# EAGLE board grad- (EAGLE 7.4.0)
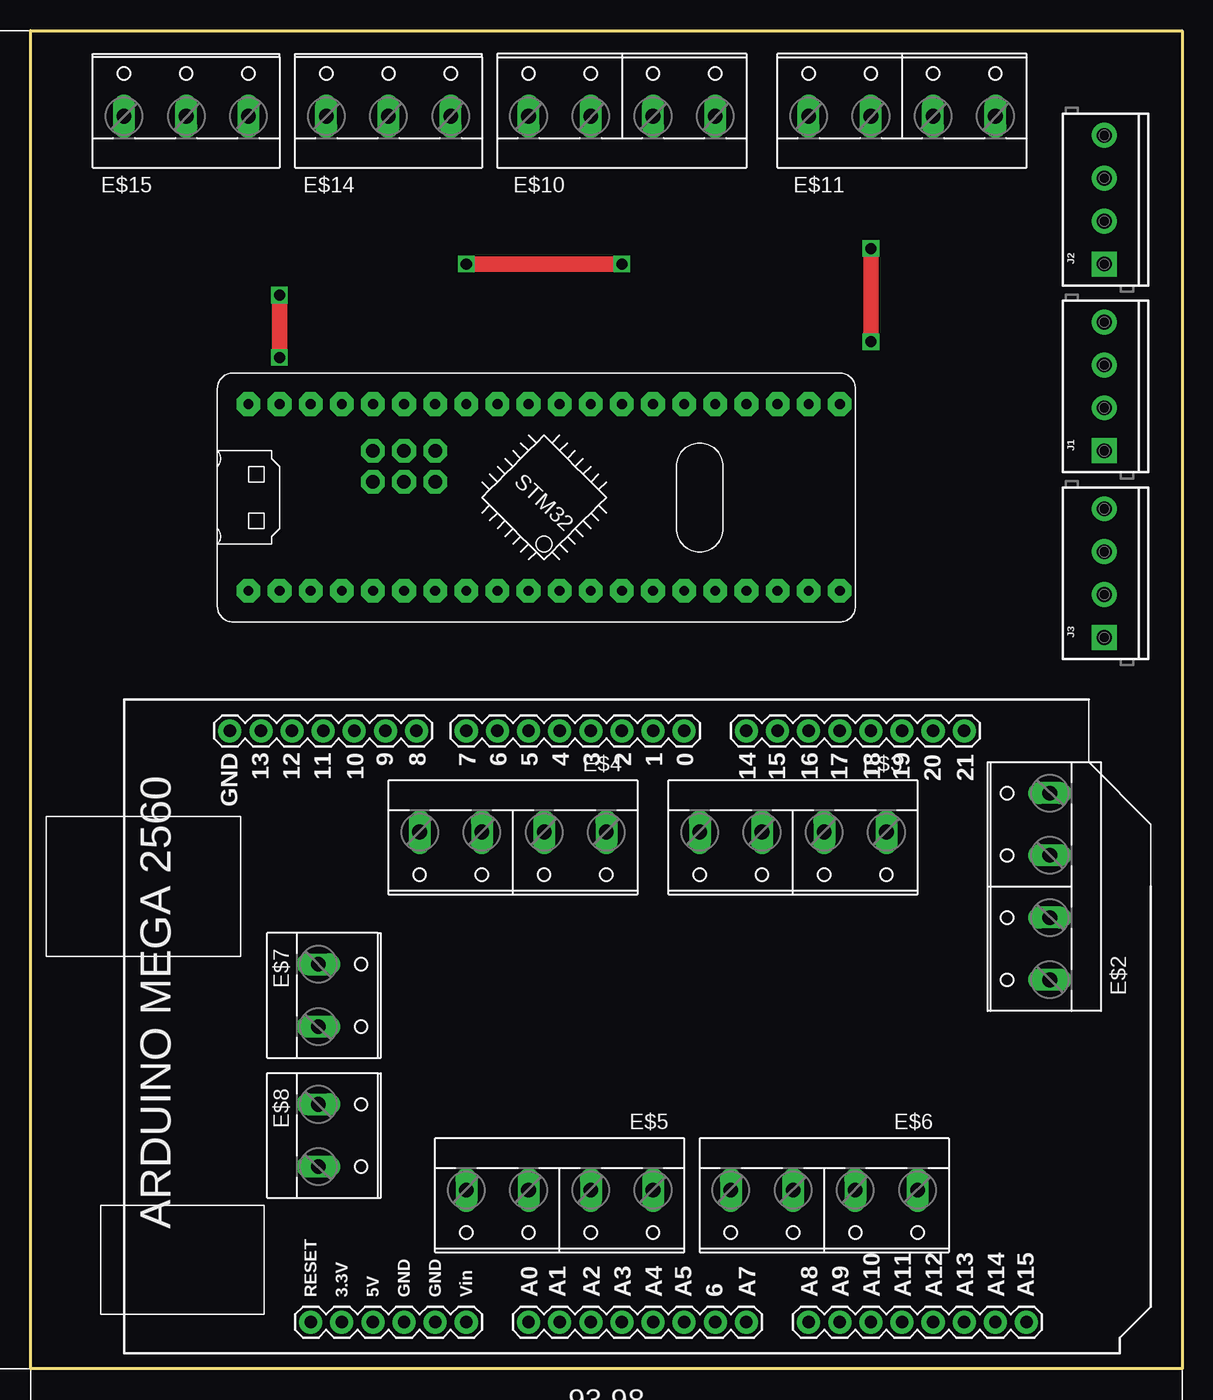
[diagram p0: board, top side]
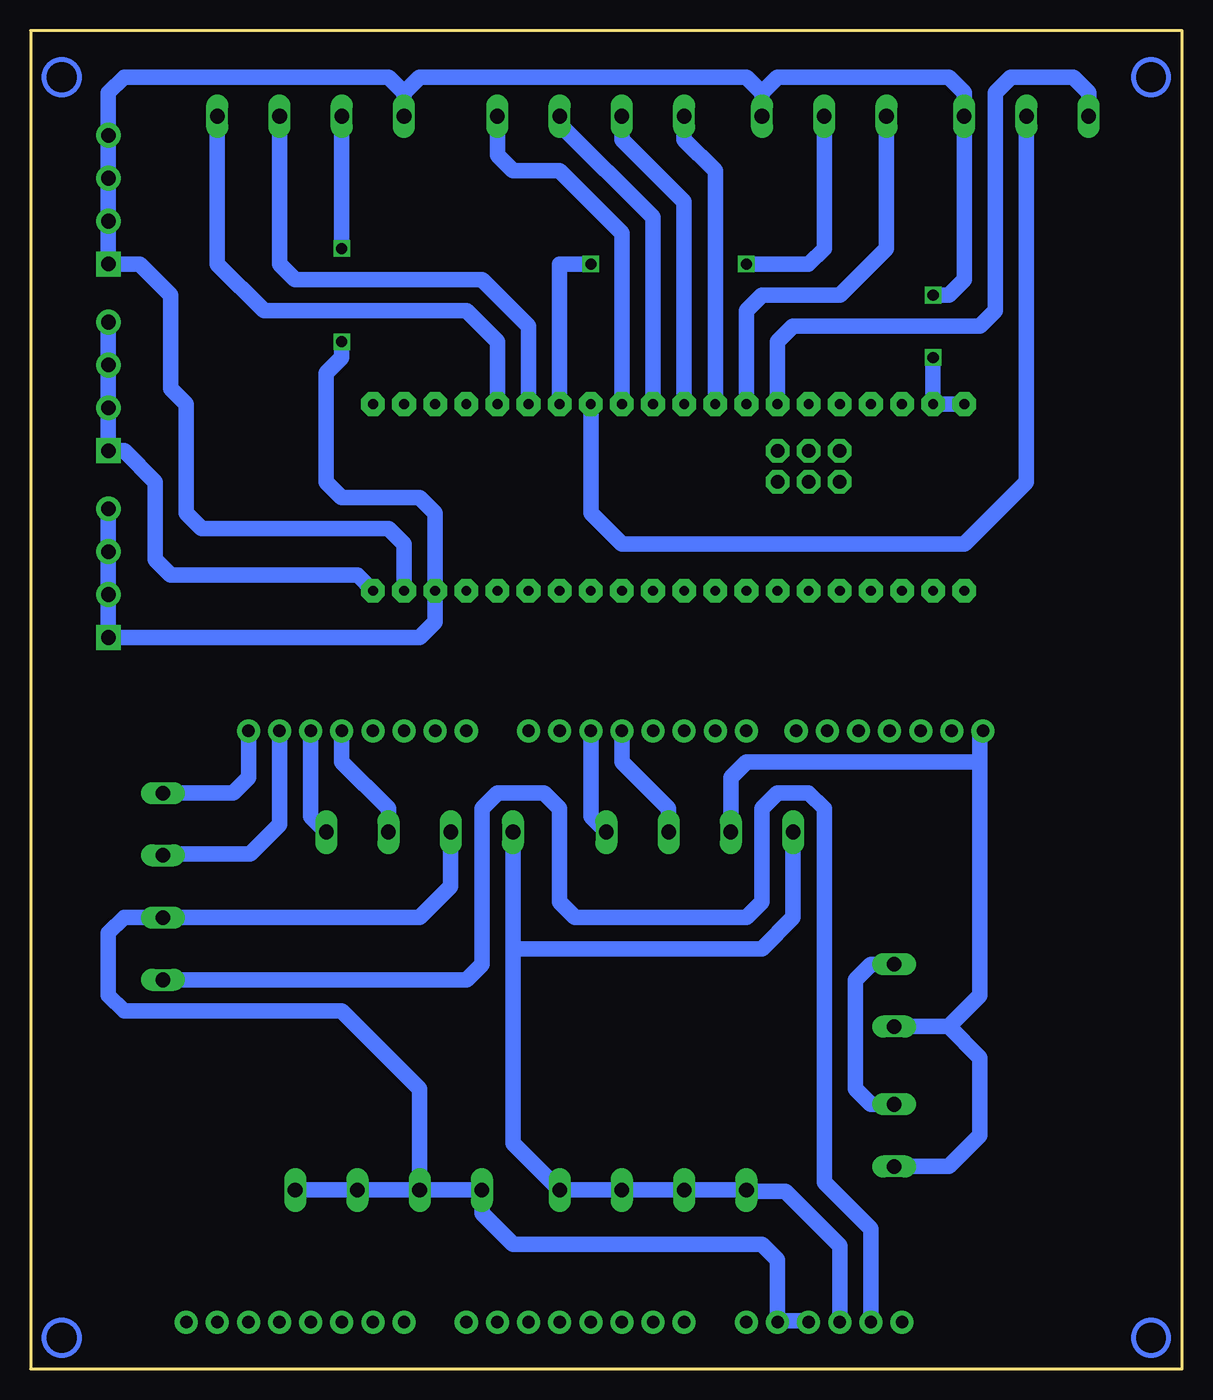
[diagram p1: board, bottom side, seen from below]

Size 93.98 x 109.22 mm. Coordinates in mm from the lower left corner, seen from the top.
Outline: 0,109.22 93.98,109.22 93.98,0 0,0 0,109.22
Copper layers (1*16): Top 0.035mm / dielectric 1.5mm / Bottom 0.035mm
Design rules "default *": minimum track width 1.2mm, minimum drill 0.35mm, track to track 0.4mm, track to pad 0.4mm, pad to pad 0.4mm, via to via 0.4mm, smd to smd 0.4mm, copper to edge 1mm, drill to drill 1mm, minimum pad ring 10mil, minimum via ring 8mil, stop-mask expansion 4mil, vias tented up to drill 0mil, thermal gap 10mil
Net classes: 0 default: width 0.152 mm, drill 0.305 mm, clearance 0.152 mm

## Footprints (pad centres in the part's own frame; a part is rotated, then mirrored left to right if it is on the bottom)
ARDUINO_MEGA2560_V1 = drill 1.016 pad 1.88: 0 45.72,50.8; 1 43.18,50.8; 2 40.64,50.8; 3 38.1,50.8; 3.3V 17.78,2.54; 4 35.56,50.8; 5 33.02,50.8; 5V 20.32,2.54; 6 30.48,50.8; 7 27.94,50.8; 8 23.876,50.8; 9 21.336,50.8; 10 18.796,50.8; 11 16.256,50.8; 12 13.716,50.8; 13 11.176,50.8; 14 50.8,50.8; 15 53.34,50.8; 16 55.88,50.8; 17 58.42,50.8; 18 60.96,50.8; 19 63.5,50.8; 20 66.04,50.8; 21 68.58,50.8; A0 33.02,2.54; A1 35.56,2.54; A2 38.1,2.54; A3 40.64,2.54; A4 43.18,2.54; A5 45.72,2.54; A6 48.26,2.54; A7 50.8,2.54; A8 55.88,2.54; A9 58.42,2.54; A10 60.96,2.54; A11 63.5,2.54; A12 66.04,2.54; A13 68.58,2.54; A14 71.12,2.54; A15 73.66,2.54; GND 8.636,50.8; GND. 25.4,2.54; GND.. 22.86,2.54; RESET 15.24,2.54; VIN 27.94,2.54
W237-4P = drill 1.194 long: 1 -7.62,-0.635; 2 -2.54,-0.635; 3 2.54,-0.635; 4 7.62,-0.635
W237-132 = drill 1.194 long: 1 -2.54,-0.635; 2 2.54,-0.635
W237-133 = drill 1.194 long: 1 -5.08,-0.635; 2 0,-0.635; 3 5.08,-0.635
SCREWTERMINAL-3.5MM-4 = drill 1.2 pad 2.032 square: 1 0,0 | drill 1.2 pad 2.032: 2 3.5,0; 3 7,0; 4 10.5,0
BLUE_PILL_ADV = drill 0.8 pad 1.93 octagon: P$1 10.16,-30.48; P$2 10.16,-27.94; P$3 10.16,-25.4; P$4 10.16,-22.86; P$5 10.16,-20.32; P$6 10.16,-17.78; P$7 10.16,-15.24; P$8 10.16,-12.7; P$9 10.16,-10.16; P$10 10.16,-7.62; P$11 10.16,-5.08; P$12 10.16,-2.54; P$13 10.16,0; P$14 10.16,2.54; P$15 10.16,5.08; P$16 10.16,7.62; P$17 10.16,10.16; P$18 10.16,12.7; P$19 10.16,15.24; P$20 10.16,17.78; P$21 -5.08,-30.48; P$22 -5.08,-27.94; P$23 -5.08,-25.4; P$24 -5.08,-22.86; P$25 -5.08,-20.32; P$26 -5.08,-17.78; P$27 -5.08,-15.24; P$28 -5.08,-12.7; P$29 -5.08,-10.16; P$30 -5.08,-7.62; P$31 -5.08,-5.08; P$32 -5.08,-2.54; P$33 -5.08,0; P$34 -5.08,2.54; P$35 -5.08,5.08; P$36 -5.08,7.62; P$37 -5.08,10.16; P$38 -5.08,12.7; P$39 -5.08,15.24; P$40 -5.08,17.78 | drill 1.1 pad 1.93 octagon: P$42 -1.27,-20.32; P$43 -1.27,-17.78; P$44 -1.27,-15.24; P$45 1.27,-15.24; P$46 1.27,-17.78; P$47 1.27,-20.32

## Placement (x,y rotation side)
E$1  [ARDUINO_MEGA2560_V1]  7.62,1.27 0 top
E$2  [W237-4P]  82.55,39.37 90 top
E$3  [W237-4P]  62.23,43.18 180 top
E$4  [W237-4P]  39.37,43.18 180 top
E$5  [W237-4P]  43.18,13.97 180 top
E$6  [W237-4P]  64.77,13.97 180 top
E$7  [W237-132]  24.13,30.48 270 top
E$8  [W237-132]  24.13,19.05 270 top
E$10  [W237-4P]  48.26,102.87 0 top
E$11  [W237-4P]  71.12,102.87 0 top
E$14  [W237-133]  29.21,102.87 0 top
E$15  [W237-133]  12.7,102.87 0 top
J1  [SCREWTERMINAL-3.5MM-4]  87.63,74.93 90 top
J2  [SCREWTERMINAL-3.5MM-4]  87.63,90.17 90 top
J3  [SCREWTERMINAL-3.5MM-4]  87.63,59.69 90 top
U$1  [BLUE_PILL_ADV]  48.26,73.66 270 top

## Library data of the parts
E$1 = E14_Arduino_revC
E$2-E$8 E$10 E$11 E$14 E$15 = con-wago-508
J1-J3 = SparkFun-Connectors; PROD_ID: CONN-14485
U$1 = BluePill

## Nets
N$11: E$11.3 U$1.P$35
N$12: E$11.4 U$1.P$36
N$13: E$11.2 J3.1 J3.2 J3.3 J3.4 U$1.P$18
N$14: E$11.1 E$14.3 E$15.3 J2.1 J2.2 J2.3 J2.4 U$1.P$19 U$1.P$21 U$1.P$22
N$15: E$14.1 U$1.P$28
N$16: E$14.2 U$1.P$34
N$17: E$10.4 U$1.P$32
N$18: E$15.1 U$1.P$27
N$19: E$15.2 U$1.P$33
N$20: E$10.3 U$1.P$31
N$21: E$10.2 U$1.P$30
N$22: E$10.1 U$1.P$29
N$23: J1.1 J1.2 J1.3 J1.4 U$1.P$20
S$1: E$1.21 E$2.4
S$2: E$1.20
S$6: E$1.5V
S$7: E$1.GND. E$6.4
S$8: E$1.3.3V E$2.1
S$9: E$1.2 E$4.1
S$10: E$7.1 E$8.1
S$11: E$1.19 E$3.1
S$12: E$1.18
S$13: E$2.2 E$6.1
S$14: E$1.3 E$4.2
S$15: E$4.3 E$7.2 E$8.2
S$16: E$3.4 E$4.4

## Tracks (layer width: path | path; a pad name or v marks a point on that pad's centre or on a via)
N$11
  Bottom 1.27: E$11.3 73.66,90.17 72.39,88.9 57.15,88.9 53.34,85.09 U$1.P$35
N$12
  Bottom 1.27: U$1.P$36 55.88,83.82 58.42,86.36 74.93,86.36 78.74,90.17 E$11.4
N$13  (via drill 0.9)
  Top 1.27: v68.58,91.44 v68.58,83.82
  Bottom 1.27: J3.4 J3.3 J3.2 J3.1 62.23,59.69 60.96,60.96 U$1.P$18 60.96,69.85 62.23,71.12 68.58,71.12 69.85,72.39 69.85,81.28 68.58,82.55 v68.58,83.82 | E$11.2 v68.58,91.44
N$14  (via drill 0.9)
  Top 1.27: v20.32,82.55 v20.32,87.63
  Bottom 1.27: U$1.P$19 63.5,67.31 64.77,68.58 80.01,68.58 81.28,69.85 81.28,78.74 82.55,80.01 82.55,87.63 85.09,90.17 J2.1 J2.2 J2.3 J2.4 87.63,104.14 86.36,105.41 64.77,105.41 63.5,104.14 | 34.29,104.14 33.02,105.41 19.05,105.41 17.78,104.14 E$15.3 17.78,88.9 19.05,87.63 v20.32,87.63 | E$14.3 34.29,104.14 | 34.29,104.14 35.56,105.41 62.23,105.41 63.5,104.14 | E$11.1 63.5,104.14 | U$1.P$21 U$1.P$22 v20.32,82.55
N$15
  Bottom 1.27: E$14.1 24.13,91.44 27.94,87.63 34.29,87.63 35.56,86.36 U$1.P$28
N$16  (via drill 0.9)
  Top 1.27: v35.56,90.17 v48.26,90.17
  Bottom 1.27: E$14.2 29.21,91.44 30.48,90.17 v35.56,90.17 | v48.26,90.17 50.8,90.17 U$1.P$34
N$17
  Bottom 1.27: U$1.P$32 45.72,92.71 50.8,97.79 54.61,97.79 55.88,99.06 E$10.4
N$18
  Bottom 1.27: U$1.P$27 33.02,83.82 31.75,85.09 16.51,85.09 15.24,86.36 15.24,104.14 13.97,105.41 8.89,105.41 7.62,104.14 E$15.1
N$19
  Bottom 1.27: E$15.2 12.7,72.39 17.78,67.31 45.72,67.31 48.26,69.85 U$1.P$33
N$20
  Bottom 1.27: U$1.P$31 43.18,93.98 50.8,101.6 E$10.3
N$21
  Bottom 1.27: U$1.P$30 40.64,95.25 45.72,100.33 E$10.2
N$22
  Bottom 1.27: E$10.1 40.64,100.33 38.1,97.79 U$1.P$29
N$23
  Bottom 1.27: U$1.P$20 67.31,64.77 82.55,64.77 83.82,66.04 83.82,72.39 86.36,74.93 J1.1 J1.2 J1.3 J1.4
S$1
  Bottom 1.27: E$2.4 77.47,46.99 76.2,48.26 E$1.21
S$2
  Bottom 1.27: 83.06,42.04 76.07,42.04 73.66,44.45 E$1.20
S$5
  Bottom 1.27: 30.35,3.94 32.89,3.94
S$6
  Bottom 1.27: E$1.5V 27.94,10.03 32.38,14.48 35.69,14.48
S$7
  Bottom 1.27: E$1.GND. 33.02,8.89 34.29,10.16 54.61,10.16 57.15,12.7 E$6.4
S$8
  Bottom 1.27: E$1.3.3V 25.4,11.43 29.21,15.24 29.21,45.72 30.48,46.99 33.02,46.99 34.29,45.72 34.29,38.1 35.56,36.83 49.53,36.83 50.8,38.1 50.8,45.72 52.07,46.99 55.88,46.99 57.15,45.72 57.15,33.02 58.42,31.75 E$2.1
S$9
  Bottom 1.27: E$1.2 48.26,45.09 E$4.1
S$10
  Bottom 1.27: E$8.1 25.4,21.59 26.67,22.86 26.67,31.75 25.4,33.02 E$7.1
S$11
  Bottom 1.27: E$1.19 71.12,45.09 E$3.1
S$12
  Bottom 1.27: E$1.18 68.58,49.53 64.77,45.72 64.77,43.18
S$13
  Bottom 1.27: 59.69,44.45 59.69,39.37 62.23,36.83 E$2.2 86.36,36.83 87.63,35.56 87.63,30.48 86.36,29.21 68.58,29.21 62.23,22.86 62.23,14.61 | E$6.1 62.23,14.61 | 62.23,14.61 57.28,14.61
S$14
  Bottom 1.27: E$1.3 45.72,49.53 41.91,45.72 E$4.2
S$15
  Bottom 1.27: 16.51,52.07 16.51,49.53 | 16.51,49.53 16.51,30.48 19.05,27.94 | E$7.2 19.05,27.94 | 19.05,27.94 16.51,25.4 16.51,19.05 19.05,16.51 E$8.2 | E$4.3 36.83,48.26 35.56,49.53 16.51,49.53
S$16
  Bottom 1.27: E$4.4 31.75,36.83 34.29,34.29 54.61,34.29 | 50.93,14.61 50.8,14.61 | 50.8,14.61 35.69,14.61 35.56,14.73 | E$3.4 54.61,34.29 | 54.61,34.29 54.61,18.41 50.8,14.61
(copper drawn outside any net)
  shapes: Bottom circle x4